# Altium PCB Heater_Backup.PcbDoc
Units mm, origin at the board's own origin, x right, y up, seen from the top; angles counter-clockwise.
Board outline 93.09 x 87.12 mm, 4 copper layers (Top Layer, GND, VCC, Bottom Layer), stack 0.603 mm thick; 83 components, 58 nets, 285 pads, 71 vias.
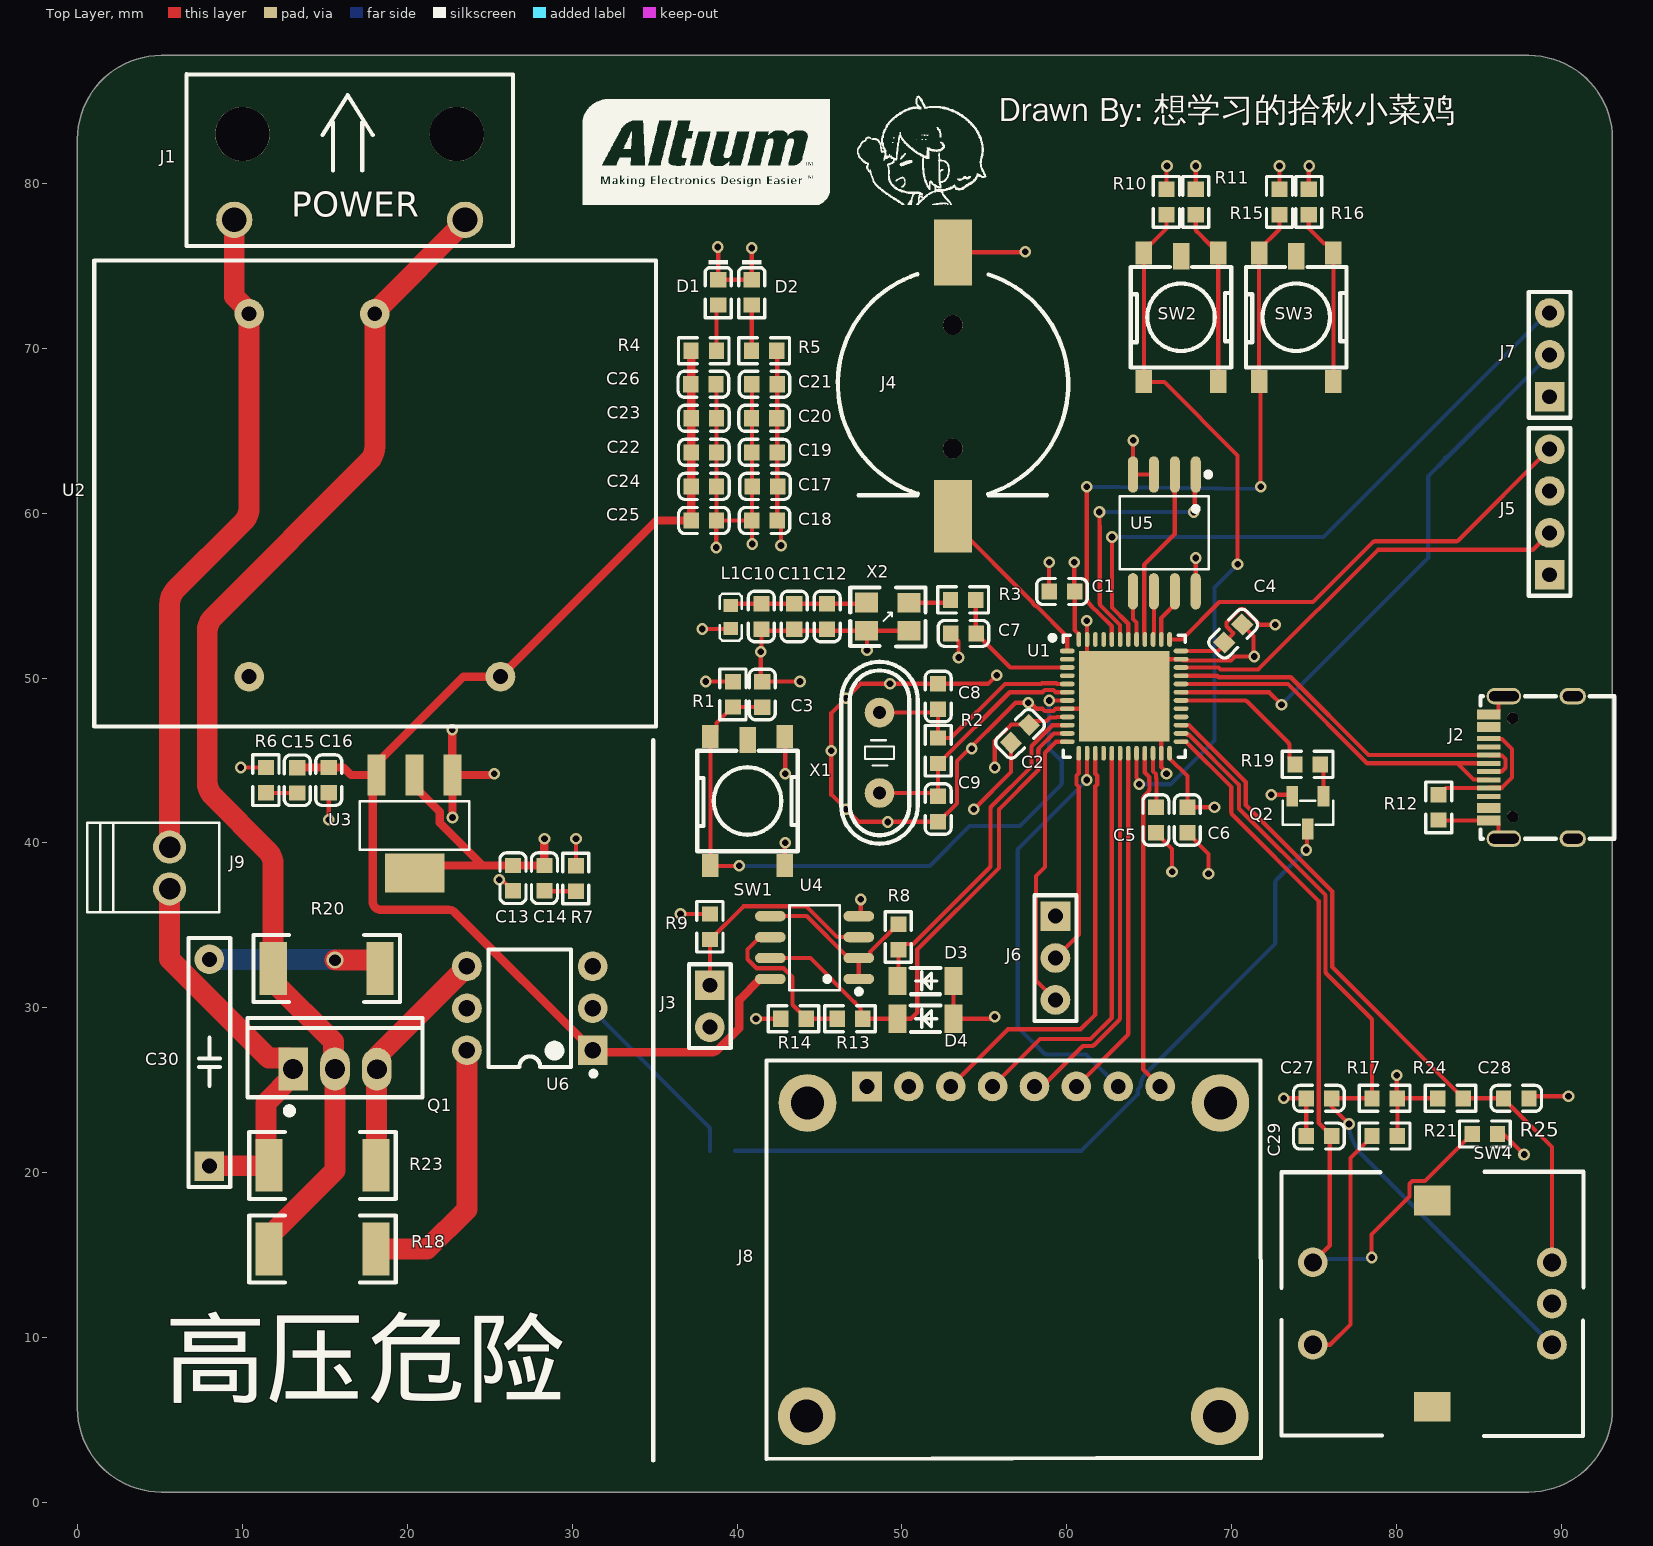
[diagram p0: Top Layer view]
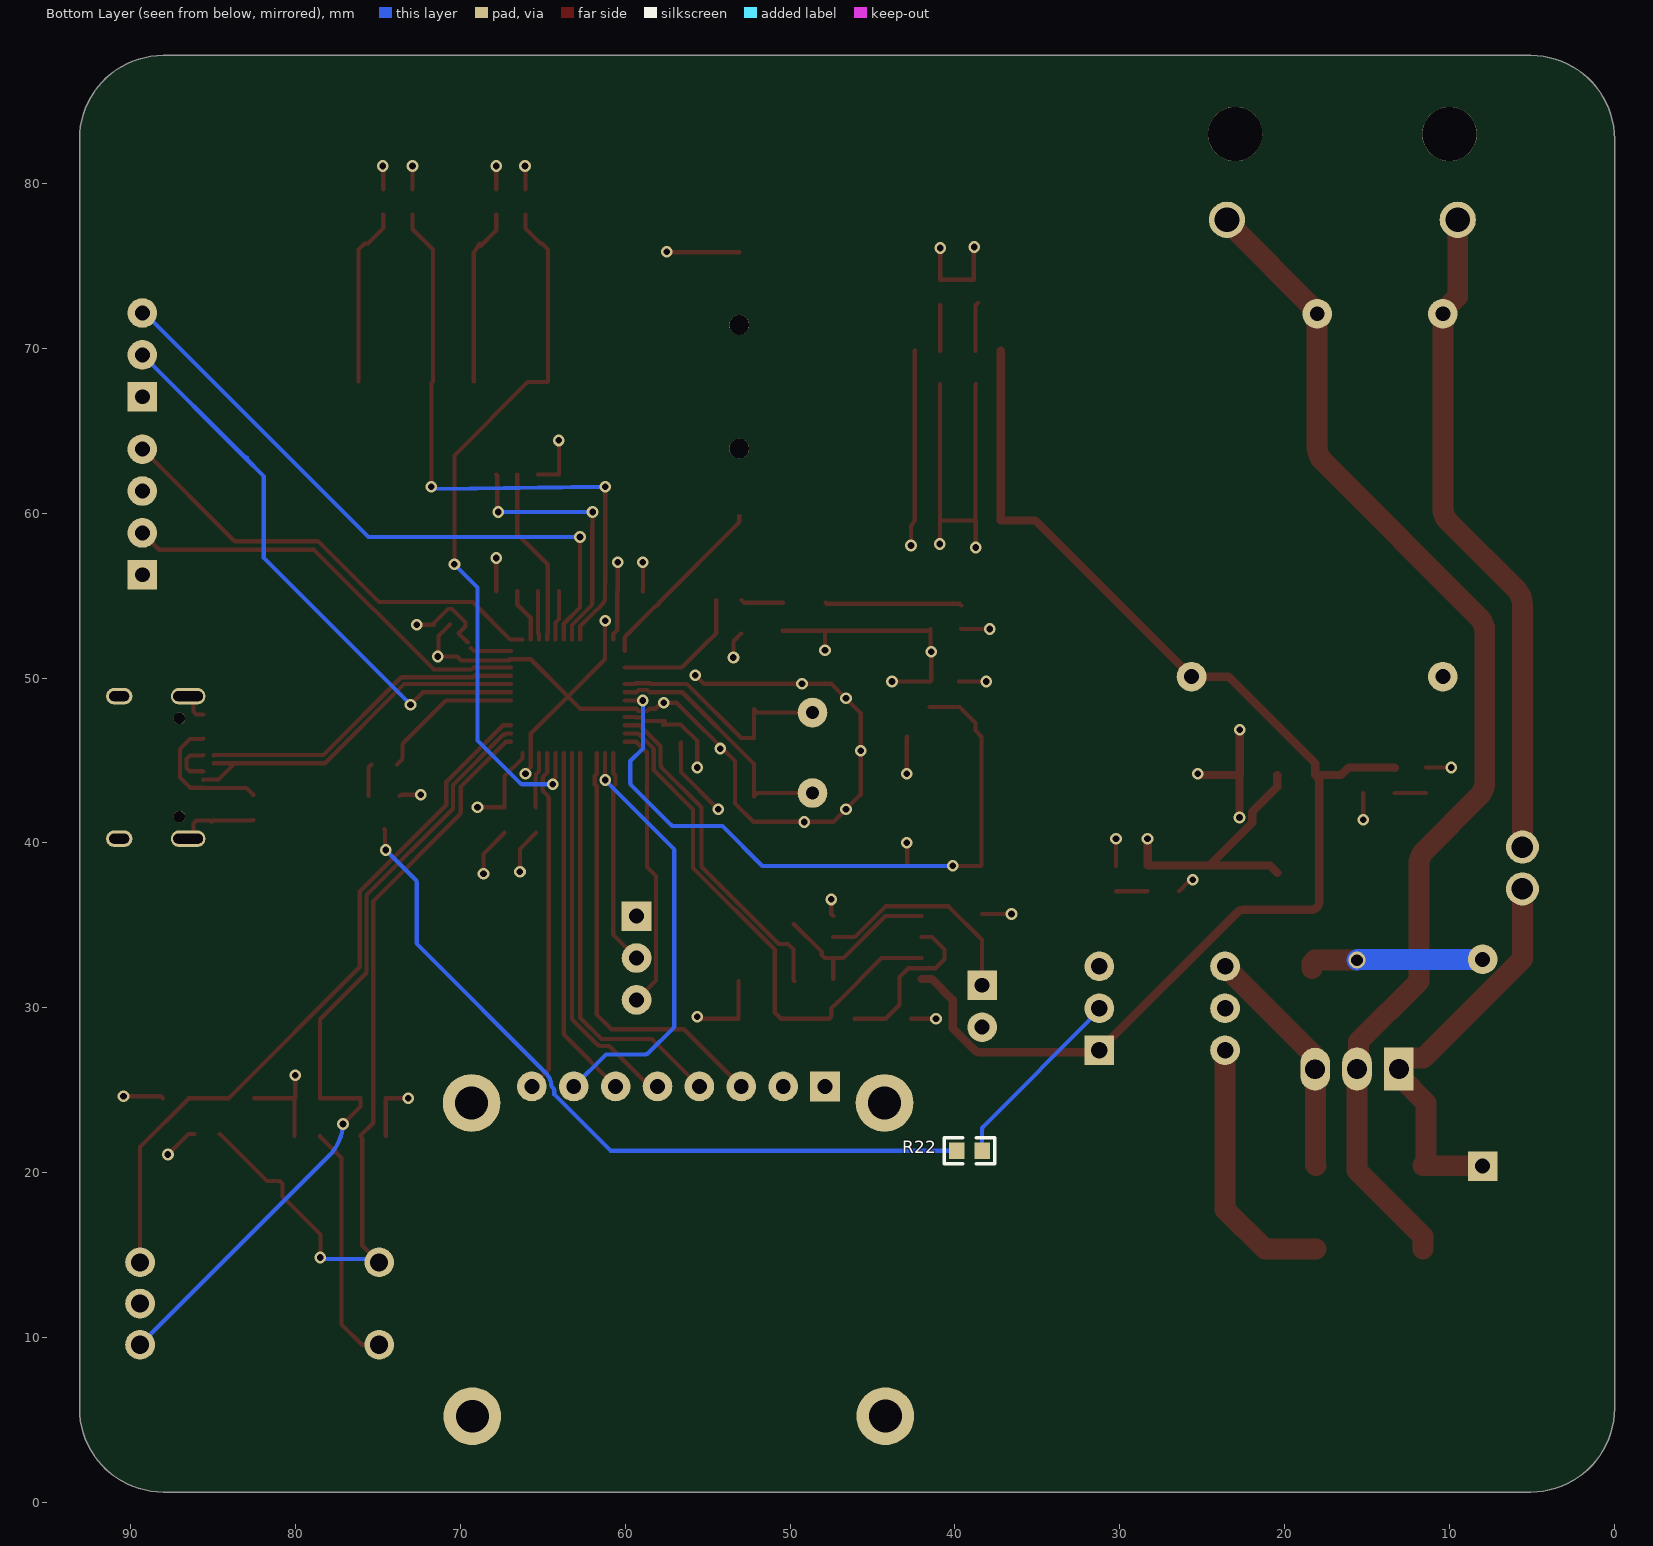
[diagram p1: Bottom Layer view, seen from below]
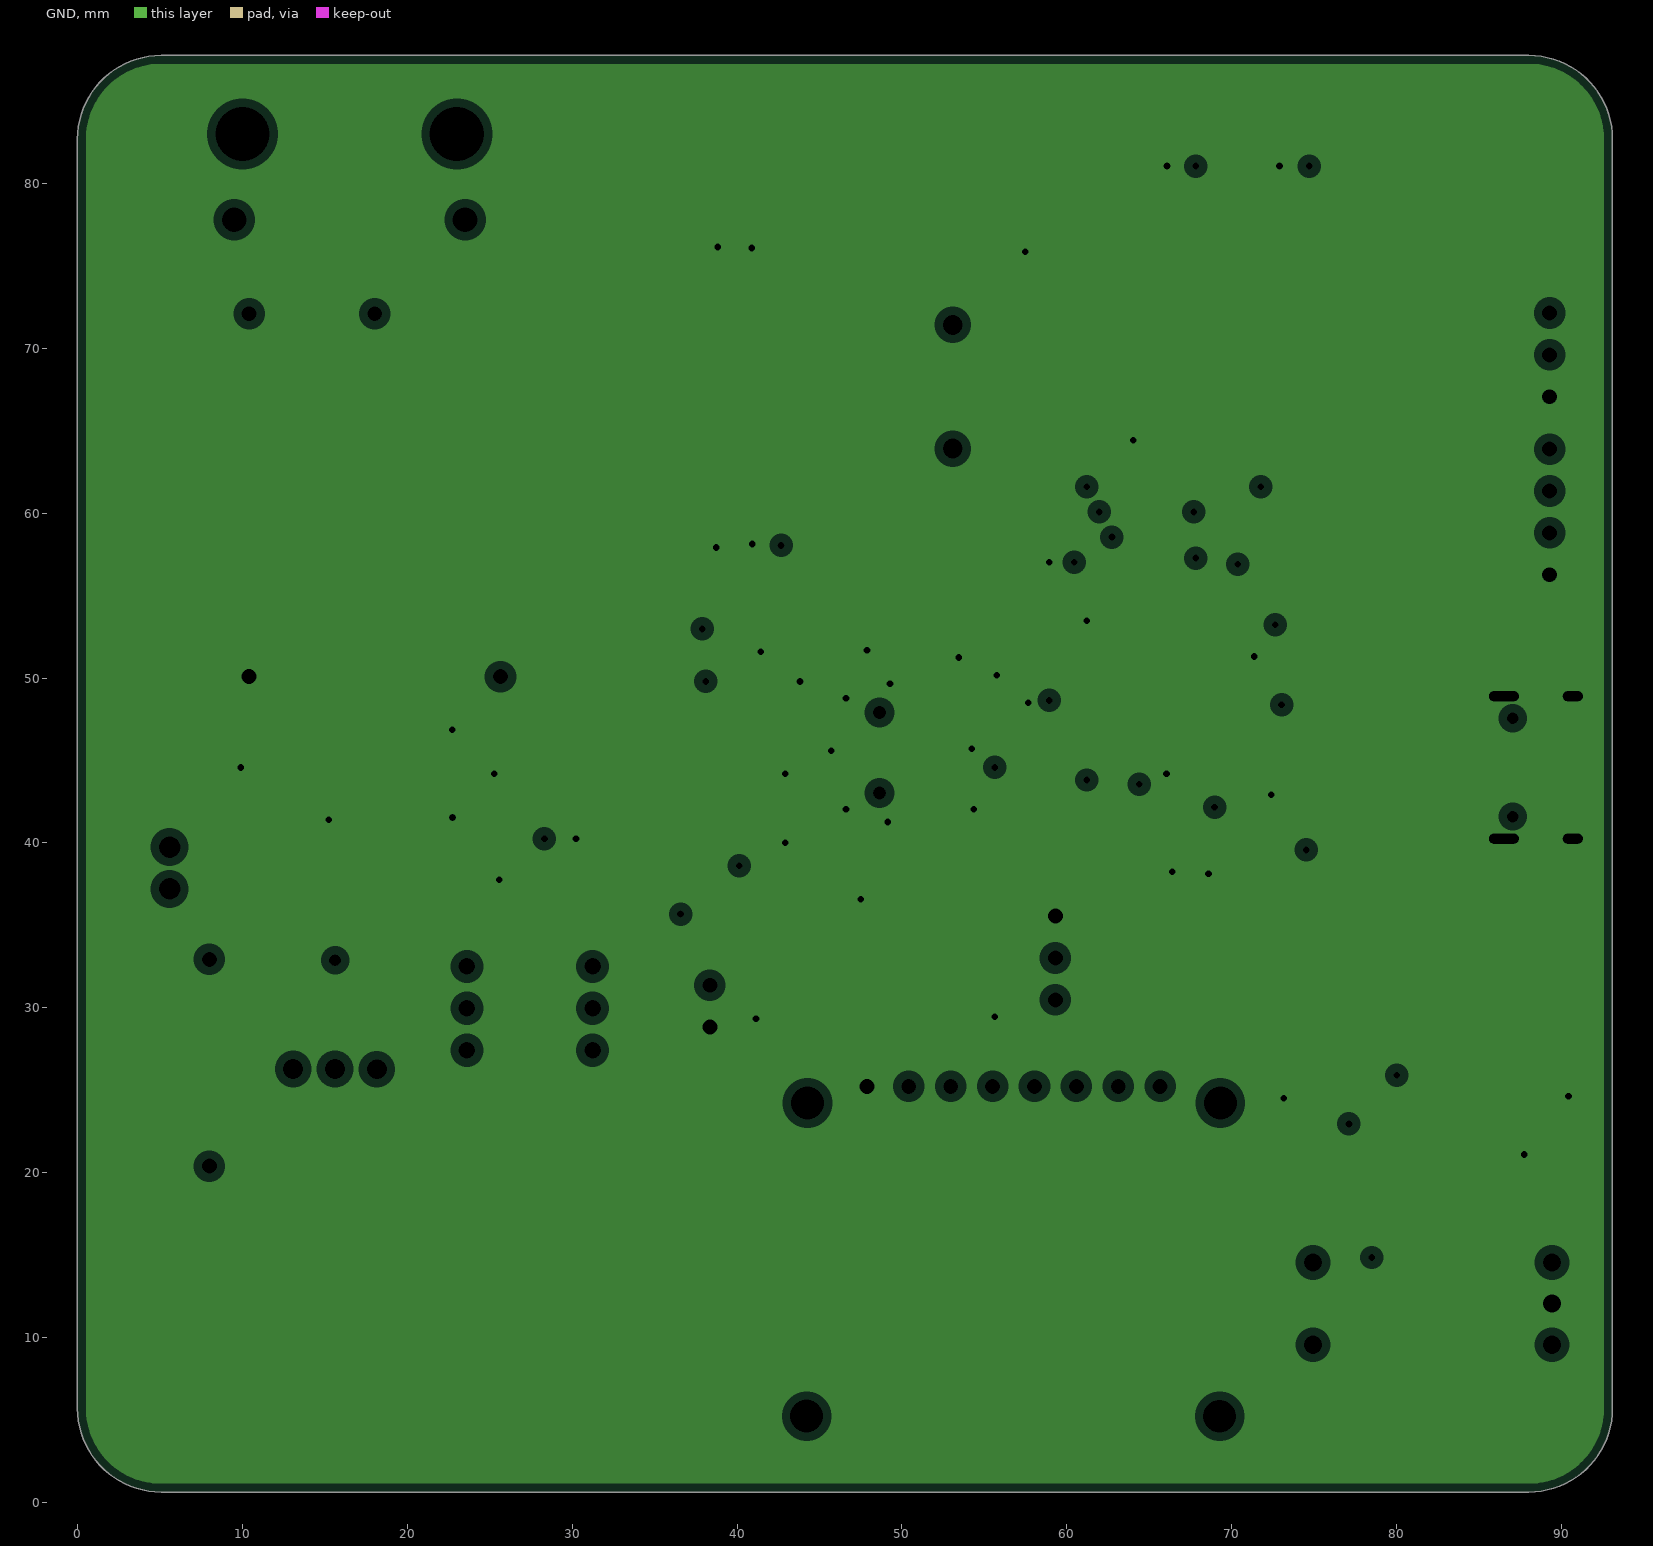
[diagram p2: GND, clearances drawn from the general rule]
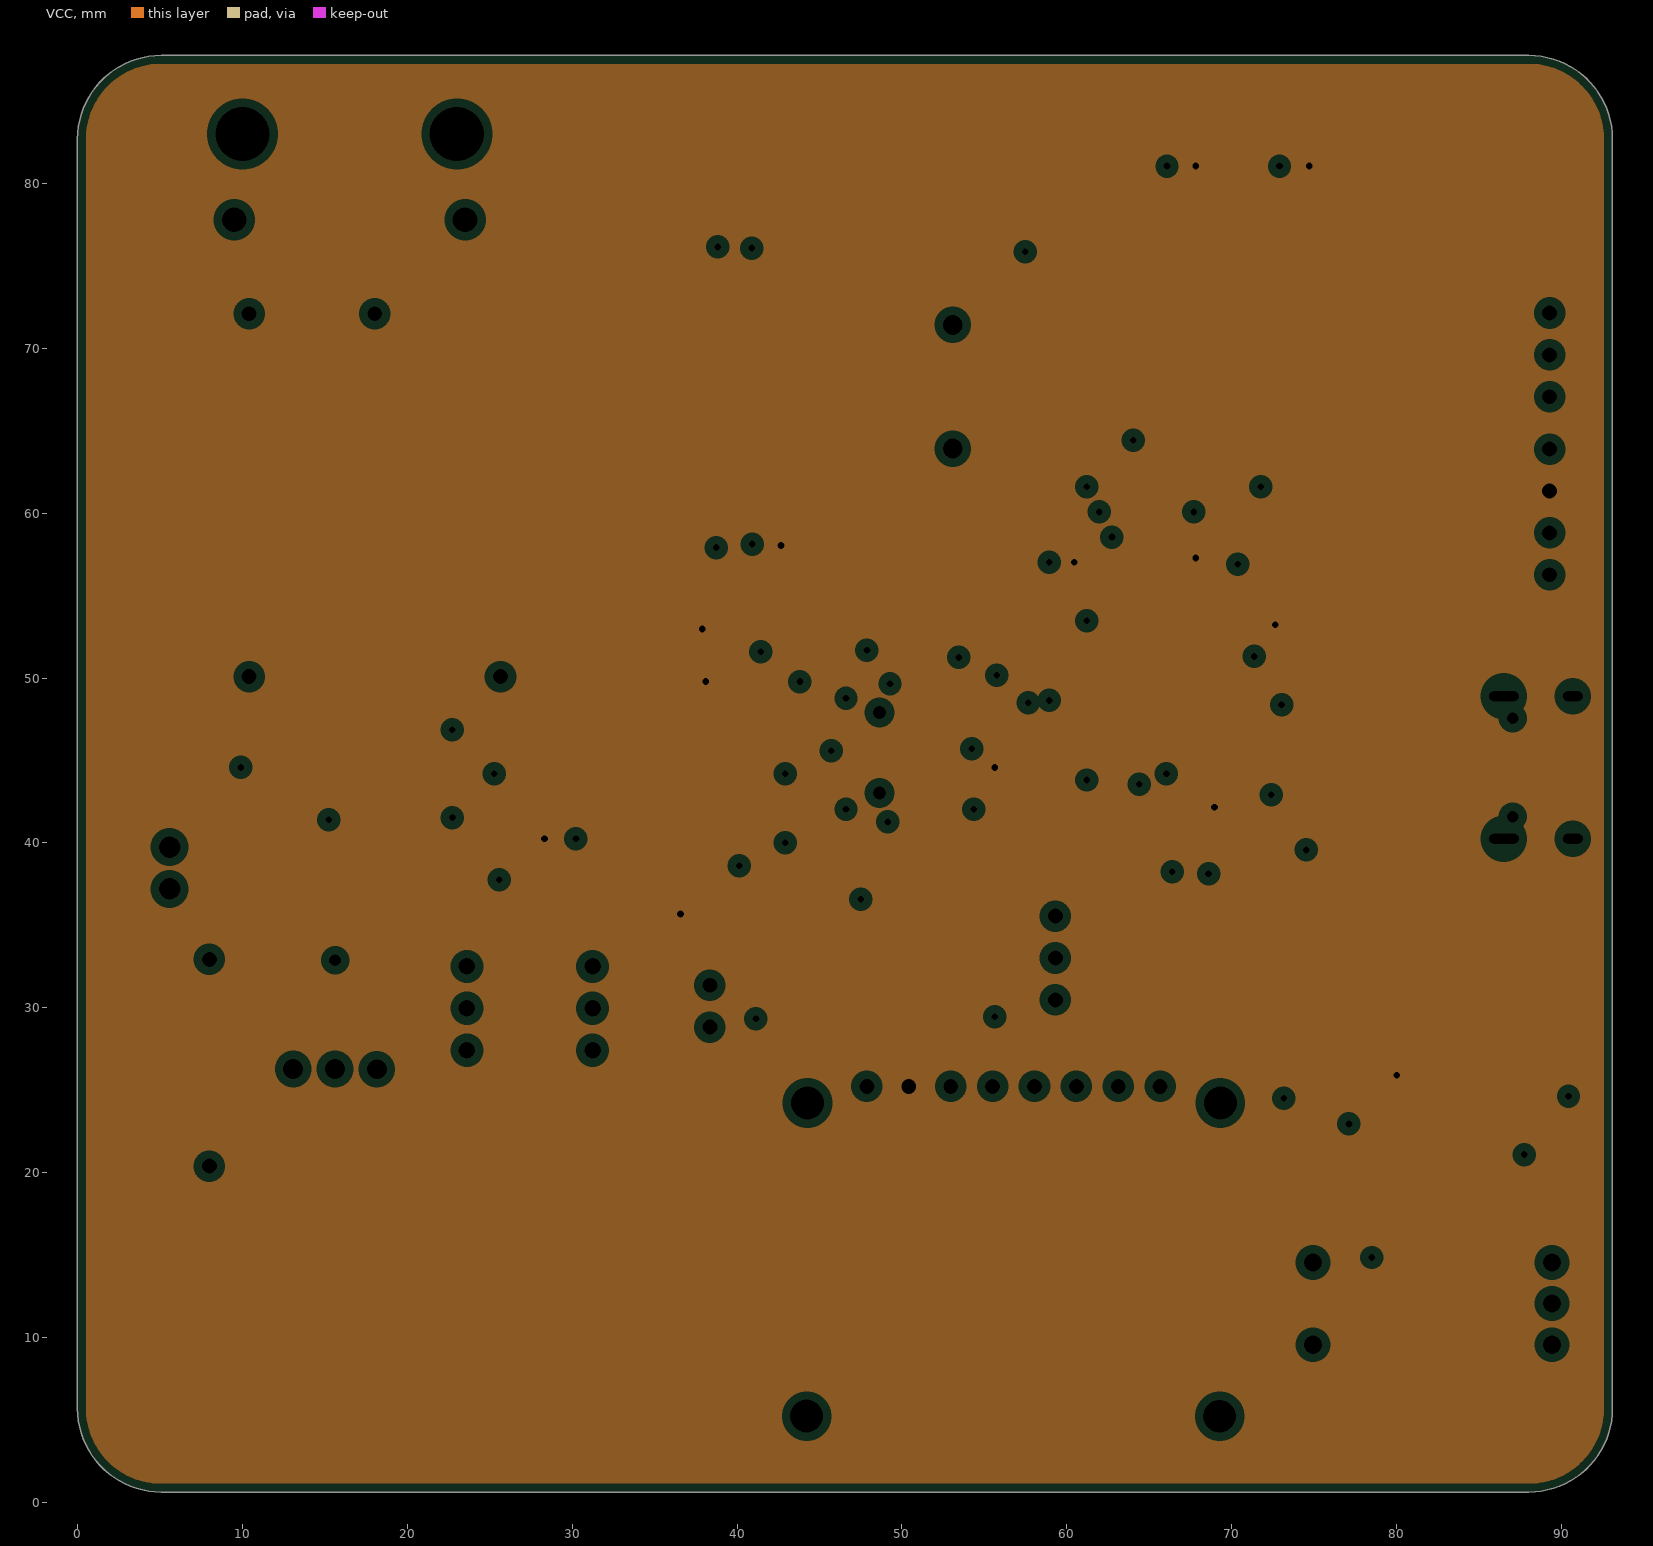
[diagram p3: VCC, clearances drawn from the general rule]
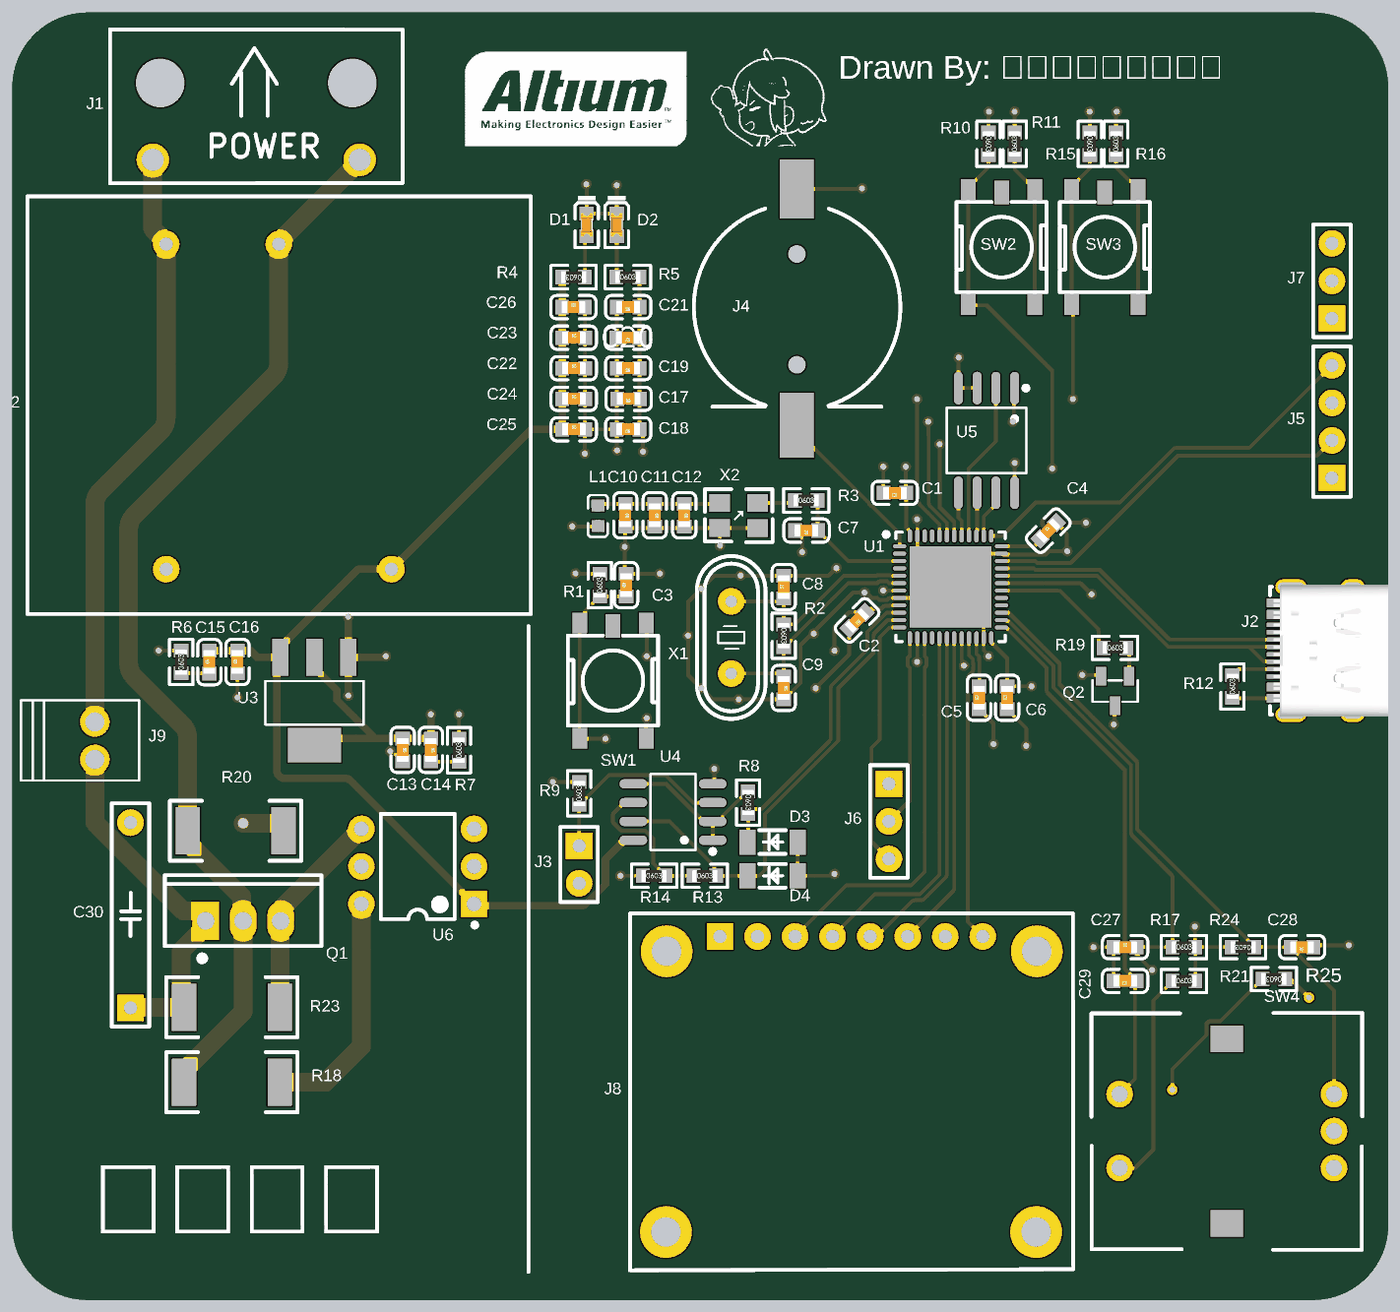
[diagram p4: 3D render of the assembled board from above, using the file's embedded part models]

## Layer stack, top to bottom
Top Solder: solder mask 0.0102, Solder Resist, Dk 3.5
Top Layer: signal copper 0.0356
Dielectric 2: prepreg 0.0711, PP-006, Dk 4.1
GND: plane copper 0.035, net GND
Dielectric 1: dielectric 0.32, FR-4, Dk 4.8
VCC: plane copper 0.035, net +3.3V
Dielectric 3: prepreg 0.0711, PP-006, Dk 4.1
Bottom Layer: signal copper 0.0356
Bottom Solder: solder mask 0.0102, Solder Resist, Dk 3.5

## Board outline
0,5.715 0,82.677 cw(c5.08,82.677) 5.08,87.757 88.011,87.757 cw(c88.011,82.677) 93.091,82.677 93.091,5.715 cw(c88.011,5.715) 88.011,0.635 5.08,0.635 cw(c5.08,5.715)

## Design rules (kind name [scope] priority, off if disabled: settings)
Clearance [All] p1: gap=0.152 ignorepadtopadclearanceinfootprint=FALSE
DiffPairsRouting [All] p1: maxlimit=0.254 minlimit=0.127 mostfreqgap=0.254 toplayer_minwidth=0.127 toplayer_maxwidth=0.381 toplayer_prefwidth=0.381 bottomlayer_minwidth=0.127 bottomlayer_maxwidth=0.381 bottomlayer_prefwidth=0.381 maxuncoupledlength=12.7
HoleSize [All] p1: absolutevalues=TRUE maxlimit=6.3 minlimit=0.2 maxpercent=80.000 minpercent=20.000
MinimumSolderMaskSliver [All] p1: minsoldermaskwidth=0.013
PlaneClearance [All] p1: clearance=0.508
PlaneConnect [All] p1: planeconnectstyle=Relief reliefexpansion=0.508 reliefentries=4 reliefconductorwidth=0.254 reliefairgap=0.254
PolygonConnect [All] p1: connectstyle=Relief reliefconductorwidth=0.254 reliefentries=4 polygonreliefangle="90 Angle" airgapwidth=0.254
RoutingVias [All] p1: holewidth=0.406 width=0.711 viastyle="Through Hole" minholewidth=0.305 minwidth=0.635 maxholewidth=1.219 maxwidth=1.016
SilkToSilkClearance [All] p1: silktosilkclearance=0.025
SilkToSolderMaskClearance [IsPad] p1: minsilkscreentomaskgap=0.023 clearancetoexposedcopper=TRUE
SolderMaskExpansion [All] p1: expansion=0.102 istentingtop=FALSE
Width [All] p1: maxlimit=1.27 minlimit=0.127 preferedwidth=0.254
23 further rules are at their usual default settings.

## Components (designator, comment, footprint, x,y, rotation, side; value= is the part's Value field where it differs from the comment)
C1 "100nF" 0603_C 59.69,55.245 r180 top
C2 "100nF" 0603_C 57.15,46.609 r225 top
C3 "100nF" 0603_C 41.529,49.022 r90 top
C4 "100nF" 0603_C 70.104,52.705 r45 top
C5 "2.2uF" 0603_C 65.405,41.402 r90 top
C6 "100nF" 0603_C 67.31,41.402 r90 top
C7 "20pF" 0603_C 53.721,52.705 r180 top
C8 "20pF" 0603_C 52.197,48.895 r90 top
C9 "20pF" 0603_C 52.197,42.037 r270 top
C10 "1uF" 0603_C 41.475,53.721 r270 top
C11 "100nF" 0603_C 43.471,53.721 r270 top
C12 "10nF" 0603_C 45.466,53.721 r270 top
C13 "100nF" 0603_C 26.416,37.846 r270 top
C14 "10uF" 0603_C 28.321,37.846 r270 top
C15 "10uF" 0603_C 13.335,43.815 r90 top
C16 "100nF" 0603_C 15.24,43.823 r90 top
C17 "100nF" 0603_C 41.686,61.62 r180 top
C18 "100nF" 0603_C 41.656,59.554 r180 top
C19 "100nF" 0603_C 41.656,63.686 r180 top
C20 "100nF" 0603_C 41.632,65.752 r180 top
C21 "10uF" 0603_C 41.656,67.818 r180 top
C22 "100nF" 0603_C 38.005,63.686 r0 top
C23 "100nF" 0603_C 38.005,65.752 r0 top
C24 "100nF" 0603_C 38.005,61.62 r0 top
C25 "100nF" 0603_C 38.005,59.554 r0 top
C26 "10uF" 0603_C 37.973,67.818 r0 top
C27 "10nF" 0603_C 75.303,24.511 r0 top
C28 "10nF" 0603_C 87.241,24.511 r180 top
C29 "10nF" 0603_C 75.272,22.225 r180 top
C30 "10nF,400V" "2PIN - BigCap" 8.001,26.67 r90 top
D1 "LED" 0603_LED 38.862,73.406 r270 top
D2 "LED" 0603_LED 40.894,73.406 r270 top
D3 "ZMM2V0" LL-34_L3.5-W1.5-RD 51.435,31.623 r0 top
D4 "ZMM2V0" LL-34_L3.5-W1.5-RD 51.435,29.337 r0 top
J1 "2Pin_Power" Power-AC-2Pin 16.51,80.391 r0 top
J2 "Type_C_16Pin" USB-C-SMD_TYPEC-304-BCP16 88.138,44.577 r90 top
J3 "NTC" 2PIN 38.354,30.099 r270 top
J4 "BAT_" VBAT 53.086,67.818 r270 top
J5 "SWD" 4PIN 89.281,60.071 r90 top
J6 "UART_OUT" 3Pin 59.309,33.02 r270 top
J7 "UART_OUT" 3Pin 89.281,69.596 r90 top
J8 "IPS" IPS_8PIN 56.769,14.732 r0 top
J9 "2PIn_To_Heater" CONN-TH_2.54-2P 5.588,38.481 r270 top
L1 "0Ω" L0603 39.624,53.698 r90 top
Q1 "BT138-600E" TO-220-3_L10.0-W4.5-P2.54-L 15.621,26.284 r0 top
Q2 "2N7002K_C2931745" SOT-23-3_NMOS 74.617,41.842 r90 top
R1 "4.7kΩ" "0603 _R" 39.751,49.022 r90 top
R2 "1MΩ" "0603 _R" 52.197,45.581 r270 top
R3 "33Ω" "0603 _R" 53.721,54.737 r0 top
R4 "1kΩ" "0603 _R" 37.973,69.85 r180 top
R5 "1kΩ" "0603 _R" 41.656,69.85 r0 top
R6 "1Ω" "0603 _R" 11.43,43.815 r90 top
R7 "1Ω" "0603 _R" 30.226,37.846 r90 top
R8 "1kΩ" "0603 _R" 49.784,34.29 r270 top
R9 "130kΩ" "0603 _R" 38.354,34.925 r90 top
R10 "10kΩ" "0603 _R" 66.04,78.867 r270 top
R11 "1kΩ" "0603 _R" 67.818,78.883 r90 top
R12 "5.1kΩ" "0603 _R" 82.55,42.164 r90 top
R13 "20kΩ" "0603 _R" 46.863,29.337 r0 top
R14 "1kΩ" "0603 _R" 43.434,29.337 r0 top
R15 "10kΩ" "0603 _R" 72.898,78.867 r270 top
R16 "1kΩ" "0603 _R" 74.676,78.883 r90 top
R17 "1kΩ" "0603 _R" 79.285,24.511 r0 top
R18 "360Ω,2512" 2512_R 14.859,15.367 r0 top
R19 "10Ω" "0603 _R" 74.617,44.763 r0 top
R20 "39Ω,2512" 2512_R 15.113,32.385 r0 top
R21 "1kΩ" "0603 _R" 79.285,22.225 r0 top
R22 "100Ω" "0603 _R" 39.116,21.336 r180 bottom
R23 "360Ω,2512" 2512_R 14.859,20.447 r180 top
R24 "1kΩ" "0603 _R" 83.259,24.511 r180 top
R25 "10kΩ" "0603 _R" 85.344,22.352 r180 top
SW1 "SW" SW-SMD_5P-L6.4-W6.2-P4.50-LS8.2-TL 40.64,42.542 r90 top
SW2 "SW" SW-SMD_5P-L6.4-W6.2-P4.50-LS8.2-TL 66.929,71.882 r90 top
SW3 "SW" SW-SMD_5P-L6.4-W6.2-P4.50-LS8.2-TL 73.914,71.882 r90 top
SW4 "EC11" EC11 82.169,12.065 r90 top
U1 "STM32F401CCU6" UFQFPN-48_L7.0-W7.0-P0.50-BL-EP 63.48,48.89 r270 top
U2 "AC_DC" AC_TO_DC 18.034,61.087 r270 top
U3 "AMS117-3.3V" SOT-223-3_L6.5-W3.4-P2.30-LS7.0-BR 20.447,41.148 r90 top
U4 "OP" SOP-8_OP 44.704,33.655 r90 top
U5 "MX25L8006EM2I-12G" SOP-8_L5.3-W5.3-P1.27-LS8.0-BL 65.913,58.801 r180 top
U6 "MOC3041SR2M" DIP-6_MO 27.432,29.972 r90 top
X1 "25MHz" "HC-49US_L11.0-W4.6-P4.88 - duplicate" 48.641,45.466 r270 top
X2 "32768Hz" "OSC 3225" 49.149,53.721 r0 top

## Footprints (in the part's own frame and the unit in brackets; to place one, negate y for a bottom-side part, rotate by r counter-clockwise, add the part's x,y. Pads: shape width x height; smd on the part's side, far side on the other; paste and mask are expansions set on the pad)
2PIN [mm]
  rect 1.8x1.8 hole 0.9: 1(-1.27,0)
  round 1.8 hole 0.9: 2(1.27,0)
  silkscreen extent -2.54,-1.27 2.54,1.27
"2PIN - BigCap" [mm]
  rect 1.8x1.8 hole 0.9: 1(-6.27,0)
  round 1.8 hole 0.9: 2(6.27,0)
  silkscreen extent -7.54,-1.27 7.57,1.27
3Pin [mm]
  rect 1.8x1.8 hole 0.9: 1(-2.54,0)
  round 1.8 hole 0.9: 2(0,0) 3(2.54,0)
  silkscreen extent -3.81,-1.27 3.81,1.27
4PIN [mm]
  rect 1.8x1.8 hole 0.9: 1(-3.81,0)
  round 1.8 hole 0.9: 2(-1.27,0) 3(1.27,0) 4(3.81,0)
  silkscreen extent -5.08,-1.27 5.08,1.27
"0603 _R" [mm]
  rect 0.93x0.98 smd: 1(-0.778,0) 2(0.762,0)
  silkscreen extent -1.54,-0.79 1.53,0.79, body extent -0.86,-0.4 0.84,0.4, height 0.56
0603_C [mm]
  rect 0.93x0.98 smd: 1(-0.786,0) 2(0.754,0)
  silkscreen extent -1.55,-0.79 1.52,0.79, body extent -0.82,-0.4 0.78,0.4, height 0.3
0603_LED [mm]
  rect 0.93x0.98 smd: A(0.787,0) K(-0.753,0)
  silkscreen extent -1.96,-0.79 1.55,0.79, body extent -0.78,-0.4 0.82,0.4, height 0.6
2512_R [mm]
  rect 1.65x3.2 smd mask+0.102: 1(-3.24,0) 2(3.24,0)
  silkscreen extent -4.44,-2.03 4.44,2.03
AC_TO_DC [mm]
  round 1.8 hole 0.9: 1(-11,-7.62) 2(-11,0) 3(11,-7.62) 4(11,7.62)
  silkscreen extent -14.23,-17.02 14.03,17.05
CONN-TH_2.54-2P [mm]
  round 2 hole 1.3: 1(-1.27,0) 2(1.27,0)
  silkscreen extent -2.73,-5 2.7,3
DIP-6_MO [mm]
  rect 1.8x1.8 hole 1: 1(-2.54,-3.81)
  round 1.8 hole 1: 2(0,-3.81) 3(2.54,-3.81) 4(2.54,3.81) 5(0,3.81) 6(-2.54,3.81)
  silkscreen extent -4.11,-4.01 3.56,2.5
EC11 [mm]
  round 1.8 hole 1.1: 1(-2.5,-7.25) 2(0,-7.25) 3(2.5,-7.25) 4(2.5,7.25) 5(-2.5,7.25)
  rect 1.8x2.2 smd: ""(-6.25,0) ""(6.25,0)
  silkscreen extent -8.04,-9.16 7.99,9.16
"HC-49US_L11.0-W4.6-P4.88 - duplicate" [mm]
  round 1.8 hole 0.8: 1(-2.44,0) 2(2.44,0)
  silkscreen extent -5.51,-2.32 5.51,2.32
IPS_8PIN [mm]
  rect 1.8x1.8 hole 0.9: 1(-8.89,10.5)
  round 1.8 hole 0.9: 2(-6.35,10.5) 3(-3.81,10.5) 4(-1.27,10.5) 5(1.27,10.5) 6(3.81,10.5) 7(6.35,10.5) 8(8.89,10.5)
  round 3.5 hole 2 unplated: ""(-12.544,-9.498) ""(-12.5,9.5) ""(12.5,-9.5) ""(12.544,9.498)
  silkscreen extent -14.98,-12.09 15.01,12.06
L0603 [mm]
  rect 0.8x0.864 smd: 1(-0.7,0) 2(0.7,0)
  silkscreen extent -1.42,-0.65 1.41,0.67
LL-34_L3.5-W1.5-RD [mm]
  rect 1.1x1.7 smd: 1(-1.7,0) 2(1.7,0)
  silkscreen extent -0.9,-0.8 0.9,0.8
"OSC 3225" [mm]
  rect 1.4x1.2 smd mask+0.102: 1(-1.291,-0.848) 2(1.291,-0.852) 3(1.291,0.848) 4(-1.291,0.852)
  silkscreen extent -2.29,-1.8 2.29,1.78
Power-AC-2Pin [mm]
  round 2.2 hole 1.5: 1(-7,-2.6) 2(7,-2.6)
  round 3.3 hole 3.3 unplated: ""(-6.5,2.6) ""(6.5,2.6)
  silkscreen extent -9.9,-4.19 9.91,6.22
SOP-8_L5.3-W5.3-P1.27-LS8.0-BL [mm]
  oval 0.609x2.204 smd: 1(-1.905,-3.542) 2(-0.635,-3.542) 3(0.635,-3.542) 4(1.905,-3.542) 5(1.905,3.542) 6(0.635,3.542) 7(-0.635,3.542) 8(-1.905,3.542)
  silkscreen extent -2.81,-3.69 2.69,2.21
SOP-8_OP [mm]
  oval 0.63x1.865 smd: 1(-1.905,-2.682) 2(-0.635,-2.682) 3(0.635,-2.682) 4(1.905,-2.682) 5(1.905,2.682) 6(0.635,2.682) 7(-0.635,2.682) 8(-1.905,2.682)
  silkscreen extent -2.82,-2.83 2.58,1.52
SOT-23-3_NMOS [mm]
  rect 1.25x0.7 smd: 1(1,-0.95) 2(1,0.95) 3(-1,0)
  silkscreen extent -0.73,-1.53 0.73,1.53
SOT-223-3_L6.5-W3.4-P2.30-LS7.0-BR [mm]
  rect 2.5x1.1 smd: 1(2.97,-2.3) 2(2.97,0) 3(2.97,2.3)
  rect 2.34x3.6 smd: 2(-2.97,0)
  silkscreen extent -1.57,-3.33 1.37,3.33
SW-SMD_5P-L6.4-W6.2-P4.50-LS8.2-TL [mm]
  rect 1.4x1 smd: 1(-3.9,2.25) 1(3.9,2.25) 2(-3.9,-2.25) 2(3.9,-2.25)
  rect 1.6x1 smd: ""(3.7,0)
  silkscreen extent -3.05,-3.05 3.05,3.05
TO-220-3_L10.0-W4.5-P2.54-L [mm]
  rect 1.8x2.6 hole 1.2: 1(-2.54,0.005)
  oval 1.8x2.6 hole 1.2: 2(0,0.005) 3(2.54,-0.005)
  silkscreen extent -5.3,-2.73 5.3,3.09
UFQFPN-48_L7.0-W7.0-P0.50-BL-EP [mm]
  oval 0.28x0.9 smd: 1(-2.751,-3.449) 2(-2.25,-3.449) 3(-1.75,-3.449) 4(-1.25,-3.449) 5(-0.749,-3.449) 6(-0.249,-3.449) 7(0.249,-3.449) 8(0.749,-3.449) 9(1.25,-3.449) 10(1.75,-3.449) 11(2.251,-3.449) 12(2.751,-3.449) 25(2.751,3.449) 26(2.251,3.449) 27(1.75,3.449) 28(1.25,3.449) 29(0.749,3.449) 30(0.249,3.449) 31(-0.249,3.449) 32(-0.749,3.449) 33(-1.25,3.449) 34(-1.75,3.449) 35(-2.25,3.449) 36(-2.751,3.449)
  oval 0.9x0.28 smd: 13(3.449,-2.751) 14(3.449,-2.25) 15(3.449,-1.75) 16(3.449,-1.25) 17(3.449,-0.749) 18(3.449,-0.249) 19(3.449,0.249) 20(3.449,0.749) 21(3.449,1.25) 22(3.449,1.75) 23(3.449,2.25) 24(3.449,2.751) 37(-3.449,2.751) 38(-3.449,2.25) 39(-3.449,1.75) 40(-3.449,1.25) 41(-3.449,0.749) 42(-3.449,0.249) 43(-3.449,-0.249) 44(-3.449,-0.749) 45(-3.449,-1.25) 46(-3.449,-1.75) 47(-3.449,-2.25) 48(-3.449,-2.751)
  rect 5.5x5.5 smd: 49(0,0)
  silkscreen extent -3.7,-4.5 3.7,3.7
USB-C-SMD_TYPEC-304-BCP16 [mm]
  oval 1x2.1 hole 0.6 slot 1.8 at 90 deg: 13(-4.32,1.633) 14(4.32,1.633)
  oval 1x1.6 hole 0.6 slot 1.2 at 90 deg: 15(-4.32,-2.547) 16(4.32,-2.547)
  rect 0.6x1.45 smd: A1B12(-3.225,2.547) A4B9(-2.45,2.547) B1A12(3.22,2.547) B4A9(2.45,2.547)
  rect 0.3x1.45 smd: A5(-1.25,2.547) A6(-0.25,2.547) A7(0.25,2.547) A8(1.25,2.547) B5(1.75,2.547) B6(0.75,2.547) B7(-0.75,2.547) B8(-1.75,2.547)
  round 0.7 hole 0.7 unplated: ""(-2.98,1.102) ""(2.98,1.102)
  silkscreen extent -4.32,-5.08 4.32,3.05, body extent -4.48,-4.95 4.48,2.8, height 3.26
VBAT [mm]
  rect 4.4x2.3 smd mask+0.102: 1(8,0)
  rect 4x2.3 smd mask+0.102: 2(-8,0)
  round 1.2 hole 1.2 unplated: ""(-3.6,0) ""(3.9,0)
  silkscreen extent -6.67,-6.97 6.73,7

## Part data
C1 C2 C3 C4 C5 C6 C7 C8 C9 C10 C11 C12 C13 C14 C15 C16 C17 C18 C19 C20 C21 C22 C23 C24 C25 C26 C27 C28 C29 C30: library part Capacitor
D3 D4: BOM_JLCPCB Part Class="Extended Part", BOM_Manufacturer=SEMTECH, BOM_Manufacturer Part=ZMM2V0, BOM_Supplier=LCSC, BOM_Supplier Part=C8079, spicePre=D, spiceSymbolName=ZMM2V0
L1: BOM_JLCPCB Part Class="Extended Part", BOM_Manufacturer=FH, BOM_Manufacturer Part=CBW160808U000T, BOM_Supplier=LCSC, BOM_Supplier Part=C139173, nameAlias=Value, spicePre=L, spiceSymbolName=CBW160808U000T
Q2: BOM_Manufacturer=Doeshare（德芯), BOM_Manufacturer Part=2N7002K, BOM_Supplier=LCSC, BOM_Supplier Part=C2931745, Contributor=LCSC, spicePre=Q, spiceSymbolName=2N7002K_C2931745
R1 R2 R3 R4 R5 R6 R7 R8 R9 R10 R11 R12 R13 R14 R15 R16 R17 R18 R19 R20 R21 R22 R23 R24 R25: library part Resistor
U3: library part ASM1117-3.3V
U5: BOM_JLCPCB Part Class="Extended Part", BOM_Manufacturer=Micronix, BOM_Manufacturer Part=MX25L8006EM2I-12G, BOM_Supplier=LCSC, BOM_Supplier Part=C71947, spicePre=U, spiceSymbolName=MX25L8006EM2I-12G
X1: library part XTAL-2P, "2脚无源脚晶振", BOM名称=2脚无源脚晶振, 学习资源=www.ooocke.com, 版权归属=源创客
X2: library part XTAL-ACT-4P, "4脚有源晶振", BOM名称=4脚有源晶振, 学习资源=www.ooocke.com, 版权归属=源创客

## Via types
v1: diameter 0.711, hole 0.406, Top Layer to Bottom Layer, tented both sides, 68 vias
v2: diameter 0.711, hole 0.406, Top Layer to Bottom Layer, 2 vias
v3: diameter 1.016, hole 0.711, Top Layer to Bottom Layer, tented both sides, 1 vias

## Nets (pads, with @x,y where several pads share a name; then routed paths per layer and width w, separated by ;. In a path a pad name is that pad's centre, name@x,y a point inside that pad or via, vN(x,y) a via of type N, cw(c..) or ccw(c..) an arc to the next point about the centre after c; other vN are vias at no path point)
+3.3V: C1.1 C2.1 C4.1 C6.2 C13.1 C14.1 C17.1 C18.1 C19.1 C20.1 C21.1 J5.3 J8.2 L1.1 R1.2 R5.2 R9.2 R11.2 R16.2 R17.2 R21.2 R24.2 U1.9 U1.24 U1.36 U1.48 U3.2 U5.8 | length 69.5
  Top Layer w0.254: v1(36.576,35.687) R9.2 ; v1(37.886,52.979) 39.605,52.979 L1.1 ; v1(38.105,49.795) 38.116,49.784 R1.2 ; R5.2 42.442,69.826 C19.1 42.442,61.62 C18.1 42.672,59.191 v1(42.672,58.039) ; v1(55.626,44.577) 55.626,46.173 56.635,47.182 57.688,47.182 C2.1 ; C2.1@57.596,47.401 58.774,47.401 58.973,47.6 59.359,47.6 59.4,47.64 U1.9 ; v1(60.452,57.023) 60.452,55.269 C1.1 60.476,52.909 60.729,52.656 U1.48 ; U1.24 66.231,45.131 67.31,44.051 C6.2 67.318,42.164 v1(68.961,42.164) ; U1.36 69.167,51.641 C4.1@69.318,51.792 ; U5.8 v1(67.818,57.277) ; R11.2 v1@67.818,81.026 ; C4.1@69.342,51.816 C4.1@69.367,51.816 ; C4.1 70.111,52.712 69.683,53.14 69.683,53.372 70.504,54.193 70.735,54.193 71.592,53.336 71.592,53.229 v1(72.639,53.229) ; R16.2 v1@74.676,80.947 ; v1@74.676,81.241 v1@74.71,81.274 ; v1(80.01,25.908) 80.01,24.548 R17.2 ; R21.2 R17.2 ; R24.2 R17.2
  Top Layer w0.508: U3.2@20.447,38.178 20.901,38.632 24.567,38.632 ; U3.2@20.447,44.118 20.447,43.418 21.978,41.887 21.978,41.221 24.567,38.632 ; v1(28.321,40.259) C14.1 C13.1 24.567,38.632
  other v1: 67.818,81.046 74.71,81.046
+5V: C15.2 C16.2 C22.1 C23.1 C24.1 C25.1 C26.1 R4.2 U2.4 U3.3 U4.8 U6.1 | length 79.7
  Top Layer w0.508: C15.2 13.339,44.573 15.236,44.573 C16.2 16.129,44.577 16.588,44.118 17.907,44.118 U3.3 ; R4.2 37.215,69.846 37.215,59.558 C25.1 35.121,59.554 U2.4 23.416,50.087 18.147,44.818 U3.3 ; U4.8 41.404,31.75 40.138,30.484 40.138,28.765 38.826,27.454 cw(c38.467,27.813) 38.467,27.305 31.888,27.305 U6.1 22.882,35.792 ccw(c22.523,35.433) 22.523,35.941 18.415,35.941 cw(c18.415,36.449) 17.907,36.449 17.907,43.668 cw(c18.415,43.668) 18.056,44.027 U3.3
ADC0: D3.1 R8.2 U1.10 | length 20.6
  Top Layer w0.254: D3.1 49.784,31.672 R8.2 50.122,33.866 50.69,33.866 55.298,38.473 ccw(c55.118,38.653) 55.372,38.653 55.372,42.059 cw(c55.626,42.059) 55.446,42.238 57.788,44.58 ccw(c57.607,44.758) 57.861,44.758 57.861,45.863 59.138,47.14 U1.10
ADC1: D4.1 R13.2 U1.11 U4.7 | length 32
  Top Layer w0.254: U4.7 44.45,33.02 47.136,30.334 47.424,30.046 cw(c47.244,29.867) 47.498,29.867 47.498,29.569 ccw(c47.752,29.569) 47.572,29.39 R13.2 D4.1 50.546,29.337 50.927,29.718 50.927,33.528 55.88,38.481 55.88,42.037 58.268,44.425 58.268,45.634 58.293,45.66 58.293,45.72 59.208,46.635 60.025,46.635 U1.11
BOOT0: R15.2 SW3.1 U1.44 | length 37.5
  Top Layer w0.254: v1(61.214,61.595) 61.214,55.815 ccw(c61.468,55.816) 61.217,55.778 cw(c60.941,55.735) 61.22,55.735 61.22,54.824 ccw(c61.474,54.825) 61.253,54.7 61.254,54.698 ccw(c63.17,55.8) 61.824,54.047 62.731,53.14 U1.44 ; v1(71.755,61.595) 71.755,67.891 71.664,67.982 71.664,75.782 71.664,75.982 72.898,77.216 R15.2
  Bottom Layer w0.254: v1(61.214,61.595) 71.52,61.469 ccw(c71.524,61.723) 71.704,61.544 v1(71.755,61.595)
BOOT1: R10.2 SW2.1 U1.20 | length 43.7
  Top Layer w0.254: U1.20 64.229,43.949 64.303,43.875 cw(c64.123,43.695) 64.376,43.716 v1(64.389,43.561) ; R10.2 66.04,77.259 65.136,76.355 65.052,76.355 64.679,75.982 64.679,75.782 64.679,67.982 64.716,67.945 65.913,67.945 70.358,63.5 v1(70.358,56.896)
  Bottom Layer w0.254: v1(64.389,43.561) 66.198,43.561 ccw(c66.198,43.815) 66.377,43.635 68.961,46.219 68.961,55.499 v1(70.358,56.896)
EC11_A: C27.2 R17.1 SW4.1 U1.26 | length 49.9
  Top Layer w0.254: U1.26 67.246,46.639 67.327,46.559 67.413,46.559 70.447,43.524 70.447,42.075 75.69,36.832 75.69,32.236 ccw(c75.944,32.238) 75.764,32.059 78.433,29.39 cw(c78.253,29.211) 78.507,29.212 ; v1(77.108,22.959) 76.057,24.01 C27.2 R17.1 78.507,29.211
  Bottom Layer w0.254: v1(77.108,22.959) ccw(c80.027,23.089) 77.947,21.037 SW4.1
EC11_C: C28.2 R24.1 SW4.3 U1.27 | length 43.6
  Top Layer w0.254: U1.27 66.934,47.135 67.411,47.135 70.854,43.692 70.854,42.303 76.097,37.06 76.097,32.476 84.037,24.536 R24.1 C28.2 86.487,24.486 89.419,21.554 SW4.3
EC11_SW: C29.1 R25.2 SW4.4 U1.25 | length 50.1
  Top Layer w0.254: U1.25 67.239,46.139 69.977,43.401 69.977,41.888 ccw(c70.231,41.888) 70.051,41.709 75.274,36.486 75.274,23.033 76.057,22.25 C29.1 76.02,22.188 ccw(c76.2,22.008) 75.946,22.008 75.946,15.592 SW4.4 ; v2(78.486,14.859) 78.486,16.256 80.79,18.56 80.79,19.331 80.953,19.494 81.724,19.494 R25.2
  Bottom Layer w0.254: SW4.4 75.126,14.772 78.399,14.772 v2(78.486,14.859)
Flash_CLK: U1.39 U5.6 | length 2.9
  Top Layer w0.254: U1.39 65.23,52.656 65.278,52.704 U5.6
Flash_CS: U1.43 U5.1 | length 16.3
  Top Layer w0.254: v1(61.976,60.071) 62.001,58.51 cw(c61.595,58.503) 62.001,58.503 62.002,54.549 ccw(c62.256,54.549) 62.076,54.37 ; 62.076,54.37 63.231,53.215 U1.43 ; v1(67.691,60.071) 67.754,60.134 67.754,62.28 U5.1
  Bottom Layer w0.254: v1(61.976,60.071) v1(67.691,60.071)
Flash_Hold: U1.38 U5.7 | length 3.3
  Top Layer w0.254: U1.38 65.73,53.643 66.548,54.461 U5.7
Flash_MISO: U1.40 U5.2 | length 10.8
  Top Layer w0.254: U1.40 64.73,52.656 64.694,52.692 64.694,56.873 66.548,58.727 U5.2
Flash_MOSI: U1.41 U5.5 | length 3
  Top Layer w0.254: U5.5 64.008,53.587 64.229,53.366 U1.41
GND: C1.2 C2.2 C3.2 C4.2 C5.1 C6.1 C7.2 C8.2 C9.2 C10.2 C11.2 C12.2 C13.2 C16.1 C17.2 C18.2 C19.2 C20.2 C21.2 C22.2 C23.2 C24.2 C25.2 C26.2 C27.1 C28.1 C29.2 D1.K D2.K D3.2 D4.2 J2.13 J2.14 J2.15 J2.16 J2.A1B12 J2.B1A12 J3.2 J4.2 J5.1 J6.1 J7.1 J8.1 Q2.2 R6.2 R7.2 R10.1 R12.1 R14.1 R15.1 R25.1 SW1.2 SW4.2 U1.8 U1.23 U1.35 U1.47 U1.49 U2.3 U3.1 U4.4 U5.3 U5.4 X2.1 X2.2 | length 170.9
  Top Layer w0.254: v1(9.906,44.577) R6.2 ; v1(15.24,41.402) C16.1 ; v1(25.575,37.767) 25.663,37.68 25.803,37.68 26.391,37.092 C13.2 ; R7.2 30.226,40.254 v1(30.231,40.259) ; C26.2 38.759,67.786 C23.2 C22.2 C24.2 C25.2 ; v1(38.735,57.912) 38.735,59.53 C25.2 ; v1(38.837,76.142) 38.862,76.117 D1.K D2.K v1(40.894,76.073) ; C21.2 C19.2 C18.2 ; v1(40.925,58.124) 40.902,58.147 C18.2 ; v1(41.148,29.337) 42.318,29.337 R14.1 ; SW1.2@42.89,38.642 42.89,39.969 v1(42.926,40.005) ; SW1.2@42.89,46.442 42.926,46.406 v1(42.926,44.196) ; v1(43.815,49.784) 41.537,49.784 C3.2 41.436,49.869 v1(41.436,51.601) 41.475,51.64 C10.2 41.569,52.873 X2.1 X2.1@47.862,52.869 ; U4.4 47.498,35.672 v1(47.498,36.576) ; v1(47.879,51.689) 47.879,52.852 X2.1@47.862,52.869 ; X2.2 X2.1@47.862,52.869 ; C7.2 53.438,52.234 v1(53.438,51.25) ; J4.2 57.45,75.818 v1(57.486,75.854) ; D3.2 D4.2 55.499,29.337 v1(55.626,29.464) ; v1(54.356,42.037) 56.617,44.298 56.617,45.562 56.634,45.58 56.634,46.058 C2.2 ; v1(55.753,50.165) 55.743,50.165 55.227,49.649 C8.2 47.49,49.649 45.72,47.879 45.72,42.926 47.363,41.283 C9.2 52.222,41.283 53.34,42.401 53.34,44.958 56.886,48.504 v1(57.658,48.504) 57.782,48.504 58.145,48.141 58.53,48.141 58.665,48.006 59.191,48.006 59.326,48.141 U1.8 62.731,48.141 U1.49 ; v1(58.928,57.023) 58.928,55.253 C1.2 ; v1(61.214,53.467) 61.229,53.452 U1.47 61.229,51.14 U1.49 ; v1(64.035,64.412) 64.008,64.385 U5.4 U5.3 ; C5.1 66.385,39.636 v1(66.385,38.249) ; v1(66.04,44.196) 66.04,44.3 65.73,44.61 U1.23 65.73,46.639 U1.49 ; R10.1 v1@66.04,81.01 ; v1@66.04,81.238 v1@66.076,81.274 ; C6.1 68.598,39.328 v1(68.598,38.129) ; C4.2 70.655,53.221 71.257,52.619 cw(c71.077,52.44) 71.331,52.44 71.331,51.449 ccw(c71.585,51.45) v1(71.374,51.308) 70.184,51.308 69.948,51.072 67.102,51.072 cw(c67.103,51.326) 66.998,51.094 66.998,51.14 U1.35 65.73,51.14 U1.49 ; v1(72.39,42.926) 73.583,42.926 Q2.2 ; R15.1 v1@72.898,80.899 ; v1(73.152,24.511) C27.1 C29.2 ; R12.1 82.584,41.352 85.013,41.352 85.09,41.275 85.167,41.352 J2.A1B12 86.016,41.352 86.189,41.179 86.189,40.574 J2.13 ; J2.B1A12 86.016,47.797 86.189,47.97 86.189,48.58 J2.14 ; R25.1 86.481,22.352 v2(87.732,21.101) ; C28.1 88.08,24.564 cw(c88.259,24.384) 88.259,24.638 v1(90.424,24.638) ; C25.2 C18.2
  Top Layer w0.508: v1(22.733,46.863) 22.74,46.856 22.74,44.125 U3.1 ; v1(22.74,41.536) 22.744,41.54 22.744,44.115 U3.1 ; v1(25.273,44.196) 25.195,44.118 U3.1
  other v1: 49.149,41.275 46.609,42.037 45.72,45.593 54.229,45.72 46.609,48.768 49.276,49.657 66.076,81.046 72.898,81.046
IPS_BLK: J8.8 U1.21 | length 20.9
  Top Layer w0.254: U1.21 64.73,44.269 64.999,44 64.999,43.765 65.015,43.667 cw(c64.389,43.561) 65.023,43.521 65.006,43.252 cw(c64.752,43.267) 64.932,43.088 64.709,42.865 ccw(c64.89,42.686) 64.636,42.688 64.636,26.255 J8.8
IPS_CS: J8.7 U1.14 | length 25.9
  Top Layer w0.254: v1(61.214,43.815) 61.229,43.83 U1.14
  Bottom Layer w0.254: v1(61.214,43.815) 57.096,39.697 ccw(c57.277,39.519) 57.023,39.52 57.023,28.933 ccw(c57.277,28.934) 57.096,28.756 58.601,27.251 ccw(c58.779,27.432) 58.778,27.178 61.173,27.178 J8.7
IPS_DC: J8.6 U1.19 | length 21.5
  Top Layer w0.254: J8.6 63.655,28.308 ccw(c63.475,28.487) 63.729,28.487 U1.19
IPS_MOSI: J8.4 U1.17 | length 25
  Top Layer w0.254: J8.4 58.367,28.1 61.435,28.1 62.731,29.396 U1.17
IPS_RES: J8.5 U1.18 | length 23
  Top Layer w0.254: J8.5 58.401,25.232 ccw(c58.401,25.486) 58.58,25.306 60.886,27.612 cw(c61.065,27.432) 61.064,27.686 ; 61.065,27.686 61.49,27.686 ccw(c61.49,27.94) 61.669,27.76 63.157,29.248 ccw(c62.977,29.427) 63.231,29.427 U1.18
IPS_SCK: J8.3 U1.15 | length 26.5
  Top Layer w0.254: J8.3 56.429,28.702 60.833,28.702 61.73,29.599 61.73,43.433 61.849,43.552 61.849,44.078 61.73,44.197 U1.15
L: J1.2 Q1.2 R18.1 R20.1 U2.2 | length 73.5
  Top Layer w1.27: R18.1 11.619,16.142 15.621,20.144 Q1.2 15.52,26.39 15.52,27.963 11.873,31.61 R20.1 11.873,38.655 ccw(c10.603,38.655) 11.503,39.551 8.244,42.81 cw(c9.144,43.706) 7.874,43.702 7.874,52.814 cw(c9.144,52.814) 8.246,53.712 17.664,63.13 ccw(c16.764,64.026) 18.034,64.026 U2.2 18.034,72.201 23.51,77.677 J1.2
N: J1.1 J9.1 U2.1 | length 40.3
  Top Layer w1.27: J9.1 5.588,54.467 cw(c6.858,54.465) 5.958,55.361 10.044,59.447 ccw(c9.144,60.343) 10.414,60.343 U2.1 10.414,72.23 9.51,73.134 J1.1
NetC5_2: C5.2 U1.22 | length 3.4
  Top Layer w0.254: U1.22 65.23,44.344 65.405,44.168 65.405,43.933 65.43,43.908 65.43,42.182 C5.2
NetC10_1: C10.1 C11.1 C12.1 L1.2 X2.4 | length 8.3
  Top Layer w0.254: L1.2 39.732,54.507 C10.1 C12.1 47.792,54.507 X2.4
NetC14_2: C14.2 R7.1 | length 1.9
  Top Layer w0.254: C14.2 28.345,37.068 R7.1
NetC15_1: C15.1 R6.1 | length 1.9
  Top Layer w0.254: R6.1 13.327,43.037 C15.1
NetC30_1: C30.1 J9.2 Q1.1 R23.2 | length 25
  Top Layer w1.27: J9.2 5.588,32.967 11.601,26.954 12.816,26.954 13.081,26.689 Q1.1 13.081,25.889 11.43,24.238 11.43,20.636 R23.2 11.595,20.423 8.025,20.423 C30.1
NetC30_2: C30.2 R20.2 | length 10.8
  Top Layer w1.27: v3(15.621,32.893) 18.163,32.893 18.353,32.703 R20.2
  Bottom Layer w1.27: C30.2 15.574,32.94 v3(15.621,32.893)
NetD1_A: D1.A R4.1 | length 3
  Top Layer w0.254: D1.A@38.608,72.746 38.751,72.603 R4.1
NetD2_A: D2.A R5.1 | length 2.8
  Top Layer w0.254: R5.1 40.894,69.866 D2.A
NetJ2_A5: J2.A5 J2.B5 R12.2 | length 8.3
  Top Layer w0.254: R12.2 82.575,42.926 82.976,43.327 J2.A5 85.614,43.35 86.384,43.35 87.001,43.968 87.001,45.686 86.384,46.304 85.614,46.304 J2.B5
NetJ3_1: J3.1 R9.1 U4.3 | length 13.4
  Top Layer w0.254: J3.1 R9.1 38.379,34.147 40.386,36.154 44.209,36.154 46.074,34.29 U4.3
NetQ1_3: Q1.3 R23.1 U6.4 | length 14.4
  Top Layer w1.27: R23.1 18.13,20.478 18.13,26.248 Q1.3 18.262,26.38 18.262,27.152 U6.4
NetQ2_1: Q2.1 R19.2 | length 2
  Top Layer w0.254: R19.2 75.567,44.575 Q2.1
NetQ2_3: Q2.3 R22.1 | length 46.1
  Top Layer w0.254: v1(74.521,39.573) 74.569,39.621 74.569,40.794 Q2.3
  Bottom Layer w0.254: R22.1 60.891,21.336 64.298,24.743 64.298,24.951 cw(c64.552,24.95) 64.372,25.129 64.411,25.168 ccw(c64.23,25.346) 64.483,25.325 cw(c65.659,25.232) 64.824,26.065 72.57,33.811 ccw(c72.39,33.99) 72.644,33.99 72.644,37.59 cw(c72.898,37.59) 72.718,37.77 v1(74.521,39.573)
NetR3_1: R3.1 X2.3 | length 2.6
  Top Layer w0.254: X2.3 52.775,54.569 R3.1
NetR8_1: R8.1 U4.1 U4.2 U4.5 | length 11
  Top Layer w0.254: U4.5 44.229,35.56 46.769,33.02 U4.2 ; U4.1 U4.2 ; R8.1 49.759,35.068 48.076,33.385 48.076,33.194 47.902,33.02 U4.2
NetR11_1: R11.1 SW2.2 | length 11
  Top Layer w0.254: R11.1 67.818,77.247 ccw(c68.072,77.248) 67.891,77.069 68.699,76.262 ccw(c68.877,76.444) 68.806,76.2 68.806,76.355 69.179,75.782 SW2.2@69.179,67.982
NetR13_1: R13.1 R14.2 U4.6 | length 10.2
  Top Layer w0.254: U4.6 41.402,34.29 40.64,33.528 40.64,32.943 41.183,32.401 42.829,32.401 43.372,31.858 43.372,30.186 44.196,29.362 R14.2 R13.1
NetR16_1: R16.1 SW3.2 | length 10.9
  Top Layer w0.254: R16.1 74.676,77.27 75.591,76.355 75.791,76.355 76.164,75.982 76.164,75.782 SW3.2@76.164,67.982
NetR18_2: R18.2 U6.6 | length 16.2
  Top Layer w1.27: R18.2 21.209,15.367 23.622,17.78 U6.6
NetR21_1: R21.1 SW4.5 | length 14.8
  Top Layer w0.254: SW4.5 75.962,9.565 77.2,10.803 77.2,20.893 78.507,22.2 R21.1
NetR22_2: R22.2 U6.2 | length 11.6
  Bottom Layer w0.254: U6.2 31.242,29.95 ccw(c31.496,29.95) 31.316,29.771 38.28,22.807 cw(c38.1,22.628) 38.354,22.629 ; R22.2 38.354,22.628
NRST: C3.1 R1.1 SW1.1 U1.7 | length 41.8
  Top Layer w0.254: v1(40.132,38.608) 38.424,38.608 38.39,38.642 38.39,46.442 38.763,46.815 38.763,47.281 39.726,48.244 R1.1 41.521,48.244 C3.1 ; v1(58.928,48.641) U1.7
  Bottom Layer w0.254: v1(40.132,38.608) 51.689,38.608 54.102,41.021 57.045,41.021 ccw(c57.045,41.275) 57.224,41.095 59.617,43.488 ccw(c59.436,43.666) 59.69,43.666 59.69,44.958 58.928,45.72 v1(58.928,48.641)
PWM_Heat: R19.1 U1.30 | length 9
  Top Layer w0.254: U1.30 70.761,48.641 cw(c70.761,48.387) 70.939,48.568 73.427,46.08 cw(c73.247,45.901) 73.501,45.902 ; 73.501,45.901 73.501,45.101 R19.1
SWCLK: J5.4 U1.37 | length 27.8
  Top Layer w0.254: U1.37 66.975,52.339 69.246,54.61 74.93,54.61 78.539,58.219 cw(c78.718,58.039) 78.718,58.293 83.588,58.293 ccw(c83.588,58.547) 83.767,58.367 J5.4
SWDIO: J5.2 U1.34 | length 25.8
  Top Layer w0.254: U1.34 69.192,50.64 69.318,50.514 71.605,50.514 78.867,57.776 88.256,57.776 J5.2
UART1_RX: J7.2 U1.31 | length 34.5
  Top Layer w0.254: U1.31 72.273,49.139 v1(73.025,48.387)
  Bottom Layer w0.254: v1(73.025,48.387) 81.915,57.277 81.915,62.23 83.132,63.447 ; 82.953,63.373 ccw(c82.953,63.627) 83.132,63.447 ; J7.2 83.132,63.447
UART1_TX: J7.3 U1.42 | length 38.7
  Top Layer w0.254: v1(62.738,58.547) 62.738,54.282 63.729,53.292 U1.42
  Bottom Layer w0.254: v1(62.738,58.547) 75.565,58.547 J7.3@89.154,72.136
UART_RX: J6.2 U1.13 | length 13.1
  Top Layer w0.254: J6.2 60.729,34.44 60.729,43.402 60.579,43.552 60.579,44.078 60.729,44.228 U1.13
UART_TX: J6.3 U1.12 | length 17.3
  Top Layer w0.254: J6.3 58.13,31.659 58.13,37.992 58.674,38.536 58.674,45.466 59.342,46.134 60.025,46.134 U1.12
USB_DM: J2.A7 J2.B7 U1.32 | length 22.3
  Top Layer w0.254: U1.32 73.41,49.639 78.222,44.827 83.693,44.827 ; J2.A7@84.956,44.827 83.693,44.827 ; J2.B7 85.568,43.85 84.67,43.85 83.693,44.827
USB_DP: J2.A6 J2.B6 U1.33 | length 22.8
  Top Layer w0.254: U1.33 69.118,50.14 69.212,50.046 73.578,50.046 78.297,45.327 84.933,45.327 J2.B6@84.956,45.304 ; J2.A6 85.614,44.35 86.384,44.35 86.595,44.561 86.595,45.093 86.384,45.304 85.614,45.304 J2.B6
VBAT: J4.1 U1.1 | length 11
  Top Layer w0.254: J4.1 53.086,59.541 ccw(c53.34,59.541) 53.16,59.362 57.896,54.626 cw(c57.717,54.446) 57.955,54.535 ccw(c58.217,54.631) 58.12,54.369 cw(c58.032,54.131) 58.211,54.311 59.956,52.566 cw(c59.776,52.386) 60.03,52.386 U1.1
XTAL_A: C8.1 R2.1 U1.5 X1.1 | length 14.6
  Top Layer w0.254: X1.1 51.994,47.906 C8.1 R2.1 52.963,46.359 56.243,49.639 58.453,49.639 58.497,49.682 59.359,49.682 59.403,49.639 U1.5
XTAL_B: C9.1 R2.2 U1.6 X1.2 | length 15.4
  Top Layer w0.254: X1.2 51.994,43.026 C9.1 R2.2 52.222,44.819 56.542,49.139 58.528,49.139 58.665,49.276 59.191,49.276 59.328,49.139 U1.6
XTAL_OUT: C7.1 R3.2 U1.3 | length 8.4
  Top Layer w0.254: R3.2 54.483,52.729 C7.1 54.507,52.68 54.845,52.342 54.87,52.342 56.572,50.64 U1.3
pads on no net: J1. J2. J2.A4B9 J2.A8 J2.B4A9 J2.B8 J4. J8. SW1. SW2. SW3. SW4. U1.2 U1.4 U1.16 U1.28 U1.29 U1.45 U1.46 U6.3 U6.5

## Polygon pours and split planes (outlines as drawn)
GND on GND (split plane): 88.31,87.239 88.608,87.21 88.903,87.161 89.194,87.093 89.481,87.006 89.761,86.901 90.033,86.777 90.297,86.636 90.551,86.478 90.794,86.304 91.025,86.114 91.244,85.91 91.448,85.691 91.638,85.46 91.812,85.217 91.97,84.963 92.111,84.699 92.235,84.427 92.34,84.147 92.427,83.86 92.495,83.569 92.544,83.274 92.573,82.976 92.582,82.695 92.581,82.677 92.581,5.715 92.582,5.697 92.573,5.416 92.544,5.118 92.495,4.823 92.427,4.532 92.34,4.245 92.235,3.965 92.111,3.693 91.97,3.429 91.812,3.175 91.638,2.932 91.448,2.701 91.244,2.482 91.025,2.278 90.794,2.088 90.551,1.914 90.297,1.756 90.033,1.615 89.761,1.491 89.481,1.386 89.194,1.299 88.903,1.231 88.608,1.182 88.31,1.153 88.029,1.144 88.011,1.145 5.08,1.145 5.062,1.144 4.781,1.153 4.483,1.182 4.188,1.231 3.897,1.299 3.61,1.386 3.33,1.491 3.058,1.615 2.794,1.756 2.54,1.914 2.297,2.088 2.066,2.278 1.847,2.482 1.643,2.701 1.453,2.932 1.279,3.175 1.121,3.429 0.98,3.693 0.856,3.965 0.751,4.245 0.664,4.532 0.596,4.823 0.547,5.118 0.518,5.416 0.509,5.697 0.51,5.715 0.51,82.677 0.509,82.695 0.518,82.976 0.547,83.274 0.596,83.569 0.664,83.86 0.751,84.147 0.856,84.427 0.98,84.699 1.121,84.963 1.279,85.217 1.453,85.46 1.643,85.691 1.847,85.91 2.066,86.114 2.297,86.304 2.54,86.478 2.794,86.636 3.058,86.777 3.33,86.901 3.61,87.006 3.897,87.093 4.188,87.161 4.483,87.21 4.781,87.239 5.062,87.248 5.08,87.247 88.011,87.247 88.029,87.248
+3.3V on VCC (split plane): 88.31,87.239 88.608,87.21 88.903,87.161 89.194,87.093 89.481,87.006 89.761,86.901 90.033,86.777 90.297,86.636 90.551,86.478 90.794,86.304 91.025,86.114 91.244,85.91 91.448,85.691 91.638,85.46 91.812,85.217 91.97,84.963 92.111,84.699 92.235,84.427 92.34,84.147 92.427,83.86 92.495,83.569 92.544,83.274 92.573,82.976 92.582,82.695 92.581,82.677 92.581,5.715 92.582,5.697 92.573,5.416 92.544,5.118 92.495,4.823 92.427,4.532 92.34,4.245 92.235,3.965 92.111,3.693 91.97,3.429 91.812,3.175 91.638,2.932 91.448,2.701 91.244,2.482 91.025,2.278 90.794,2.088 90.551,1.914 90.297,1.756 90.033,1.615 89.761,1.491 89.481,1.386 89.194,1.299 88.903,1.231 88.608,1.182 88.31,1.153 88.029,1.144 88.011,1.145 5.08,1.145 5.062,1.144 4.781,1.153 4.483,1.182 4.188,1.231 3.897,1.299 3.61,1.386 3.33,1.491 3.058,1.615 2.794,1.756 2.54,1.914 2.297,2.088 2.066,2.278 1.847,2.482 1.643,2.701 1.453,2.932 1.279,3.175 1.121,3.429 0.98,3.693 0.856,3.965 0.751,4.245 0.664,4.532 0.596,4.823 0.547,5.118 0.518,5.416 0.509,5.697 0.51,5.715 0.51,82.677 0.509,82.695 0.518,82.976 0.547,83.274 0.596,83.569 0.664,83.86 0.751,84.147 0.856,84.427 0.98,84.699 1.121,84.963 1.279,85.217 1.453,85.46 1.643,85.691 1.847,85.91 2.066,86.114 2.297,86.304 2.54,86.478 2.794,86.636 3.058,86.777 3.33,86.901 3.61,87.006 3.897,87.093 4.188,87.161 4.483,87.21 4.781,87.239 5.062,87.248 5.08,87.247 88.011,87.247 88.029,87.248

## Silkscreen, mask and mechanical layers (free items; w line width, h text height)
Top Overlay:
  drawing of 3173 lines, arcs and shapes, not listed
  text "Drawn By: 想学习的拾秋小菜鸡" at 55.88,83.281 h2.54
  text "高压危险" at 5.334,5.136 h7.62
Mechanical 15:
  the board outline again, w0.254
Drill Drawing:
  text ".Legend" at 112.903,0.508 h1.52

## Text inside footprints (layer, text, board x,y; h text height)
J1: Top Overlay "POWER" at 12.954,77.978 h1.52